# Altium PCB BULETM-SMD_PB-03F.pcbdoc
Units mm, origin at the board's own origin, x right, y up, seen from the top; angles counter-clockwise.
Board outline 30.2 x 37.51 mm, 2 copper layers (Top Layer, Bottom Layer); 1 components, 0 nets, 22 pads, 0 vias.
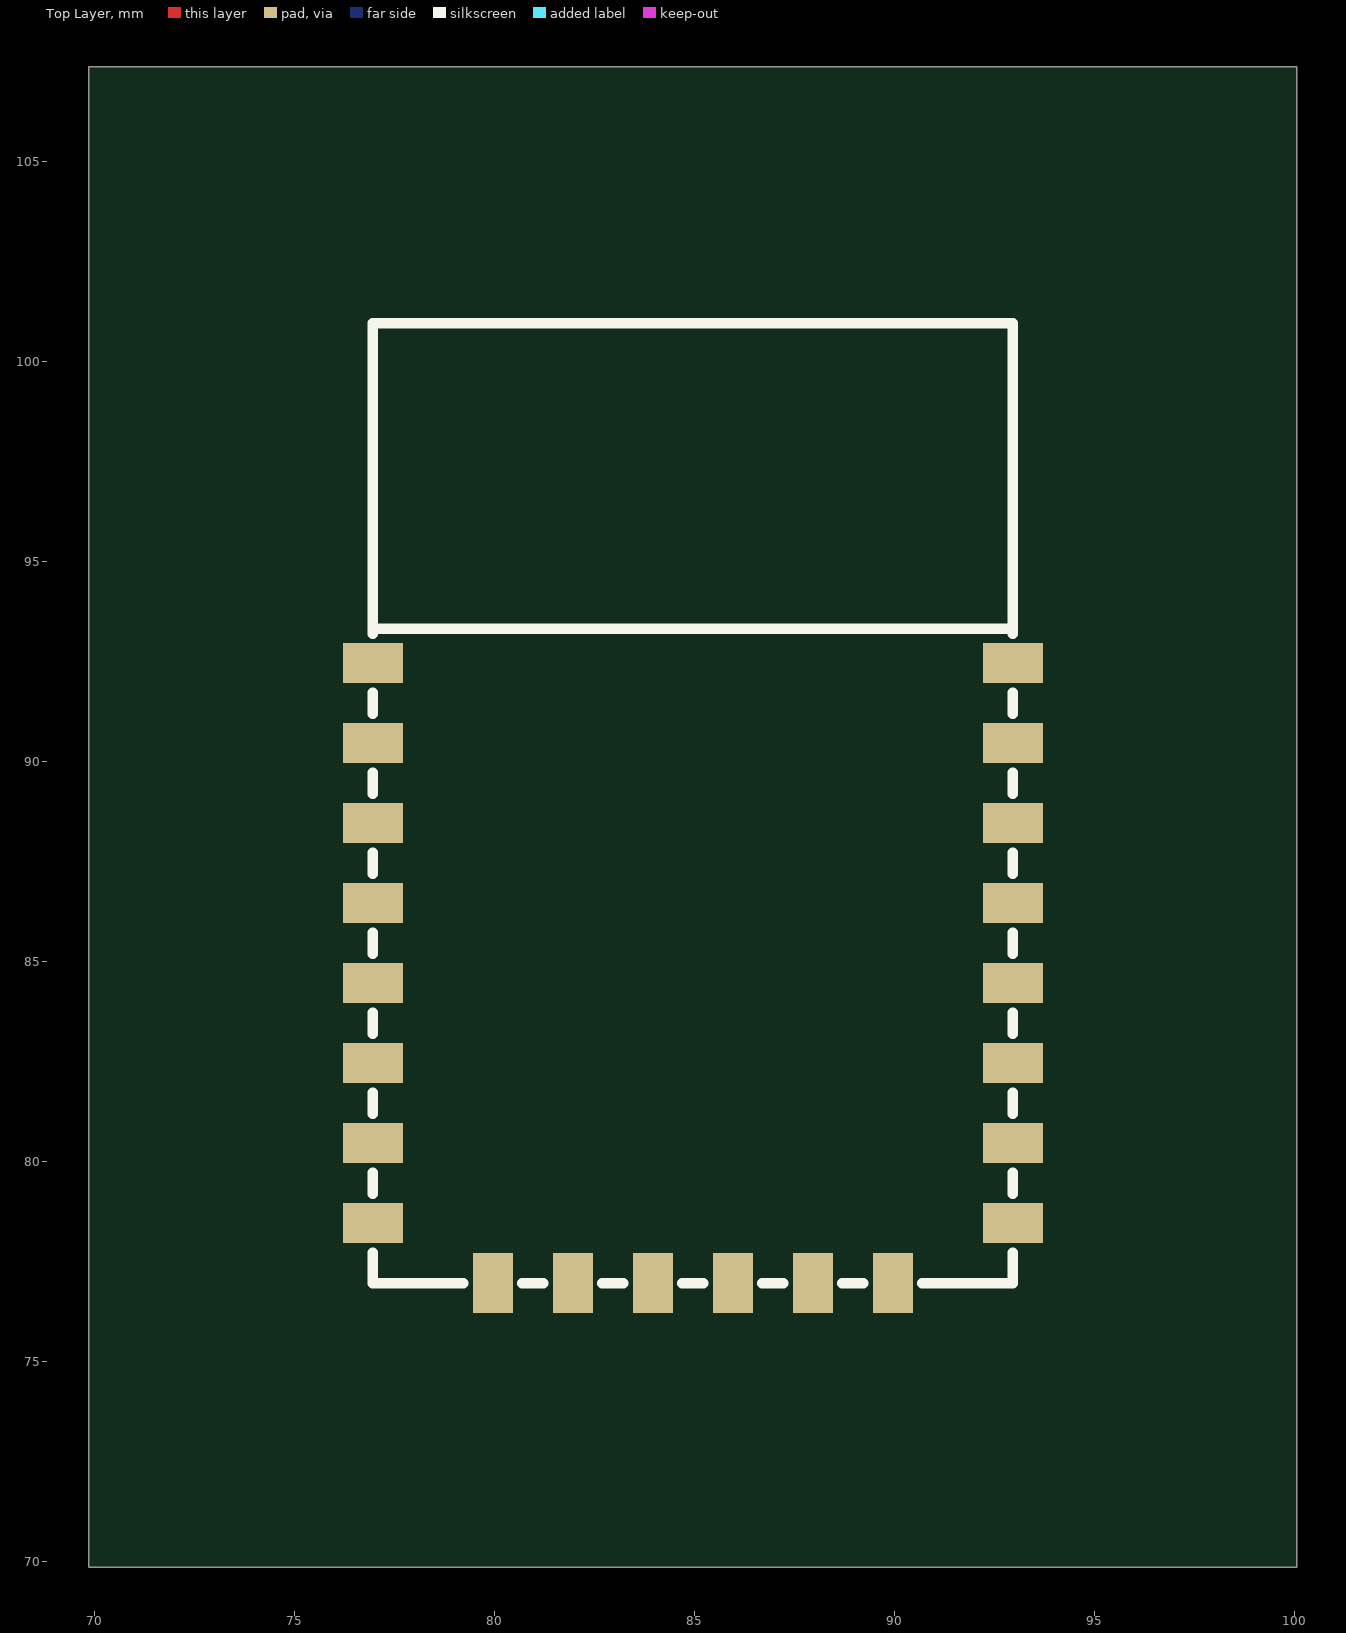
[diagram p0: Top Layer view]
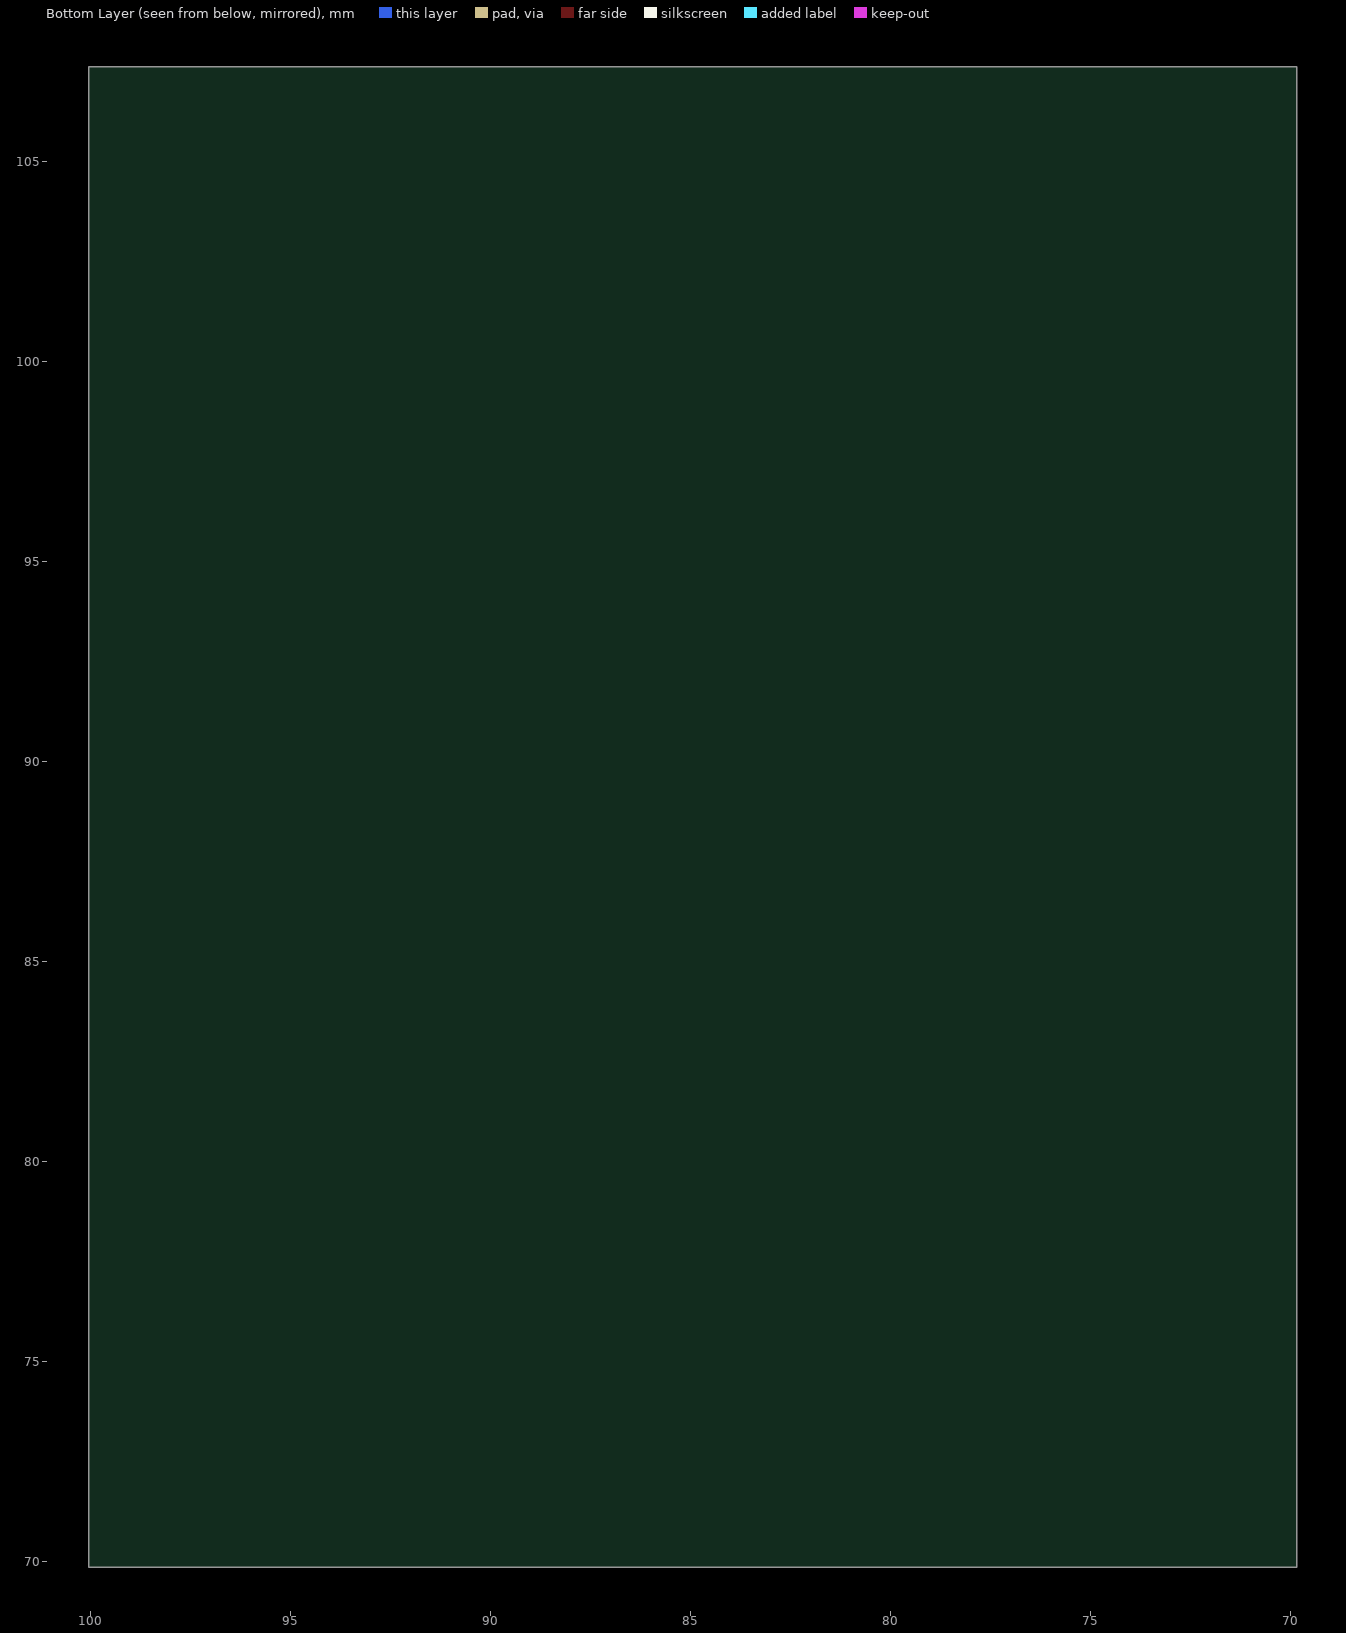
[diagram p1: Bottom Layer view, seen from below]

## Layer stack, top to bottom
Top Layer: signal copper (thickness not stored)
Dielectric: dielectric 0.32, FR-4, Dk 4.8
Bottom Layer: signal copper (thickness not stored)

## Board outline
100.05,69.85 69.85,69.85 69.85,107.36 100.05,107.36

## Components (designator, comment, footprint, x,y, rotation, side; value= is the part's Value field where it differs from the comment)
? "BULETM-SMD_PB-03F" BULETM-SMD_PB-03F 84.95,84.7 r0 top

## Footprints (in the part's own frame and the unit in brackets; to place one, negate y for a bottom-side part, rotate by r counter-clockwise, add the part's x,y. Pads: shape width x height; smd on the part's side, far side on the other; paste and mask are expansions set on the pad)
BULETM-SMD_PB-03F [mm]
  rect 1.5x1 smd: 1(-8,7.75) 2(-8,5.75) 3(-8,3.75) 4(-8,1.75) 5(-8,-0.25) 6(-8,-2.25) 7(-8,-4.25) 8(-8,-6.25) 15(8,-6.25) 16(8,-4.25) 17(8,-2.25) 18(8,-0.25) 19(8,1.75) 20(8,3.75) 21(8,5.75) 22(8,7.75)
  rect 1x1.5 smd: 9(-5,-7.75) 10(-3,-7.75) 11(-1,-7.75) 12(1,-7.75) 13(3,-7.75) 14(5,-7.75)
  silkscreen extent -8,-7.75 8,16.25

## Nets (pads, with @x,y where several pads share a name; then routed paths per layer and width w, separated by ;. In a path a pad name is that pad's centre, name@x,y a point inside that pad or via, vN(x,y) a via of type N, cw(c..) or ccw(c..) an arc to the next point about the centre after c; other vN are vias at no path point)
pads on no net: ?.1 ?.2 ?.3 ?.4 ?.5 ?.6 ?.7 ?.8 ?.9 ?.10 ?.11 ?.12 ?.13 ?.14 ?.15 ?.16 ?.17 ?.18 ?.19 ?.20 ?.21 ?.22